# Altium PCB Tigershark 3D R2.PcbDoc (part 3 of 4)
Units mil, origin at the board's own origin, x right, y up, seen from the top; angles counter-clockwise.
Board outline 4100 x 4050 mil, 4 copper layers (Top Layer, Groun Plane, Power Plane, Bottom Layer), stack 61.73 mil thick; 349 components, 235 nets, 1133 pads, 579 vias.
Unrouted connection lines stored in the file: 67.
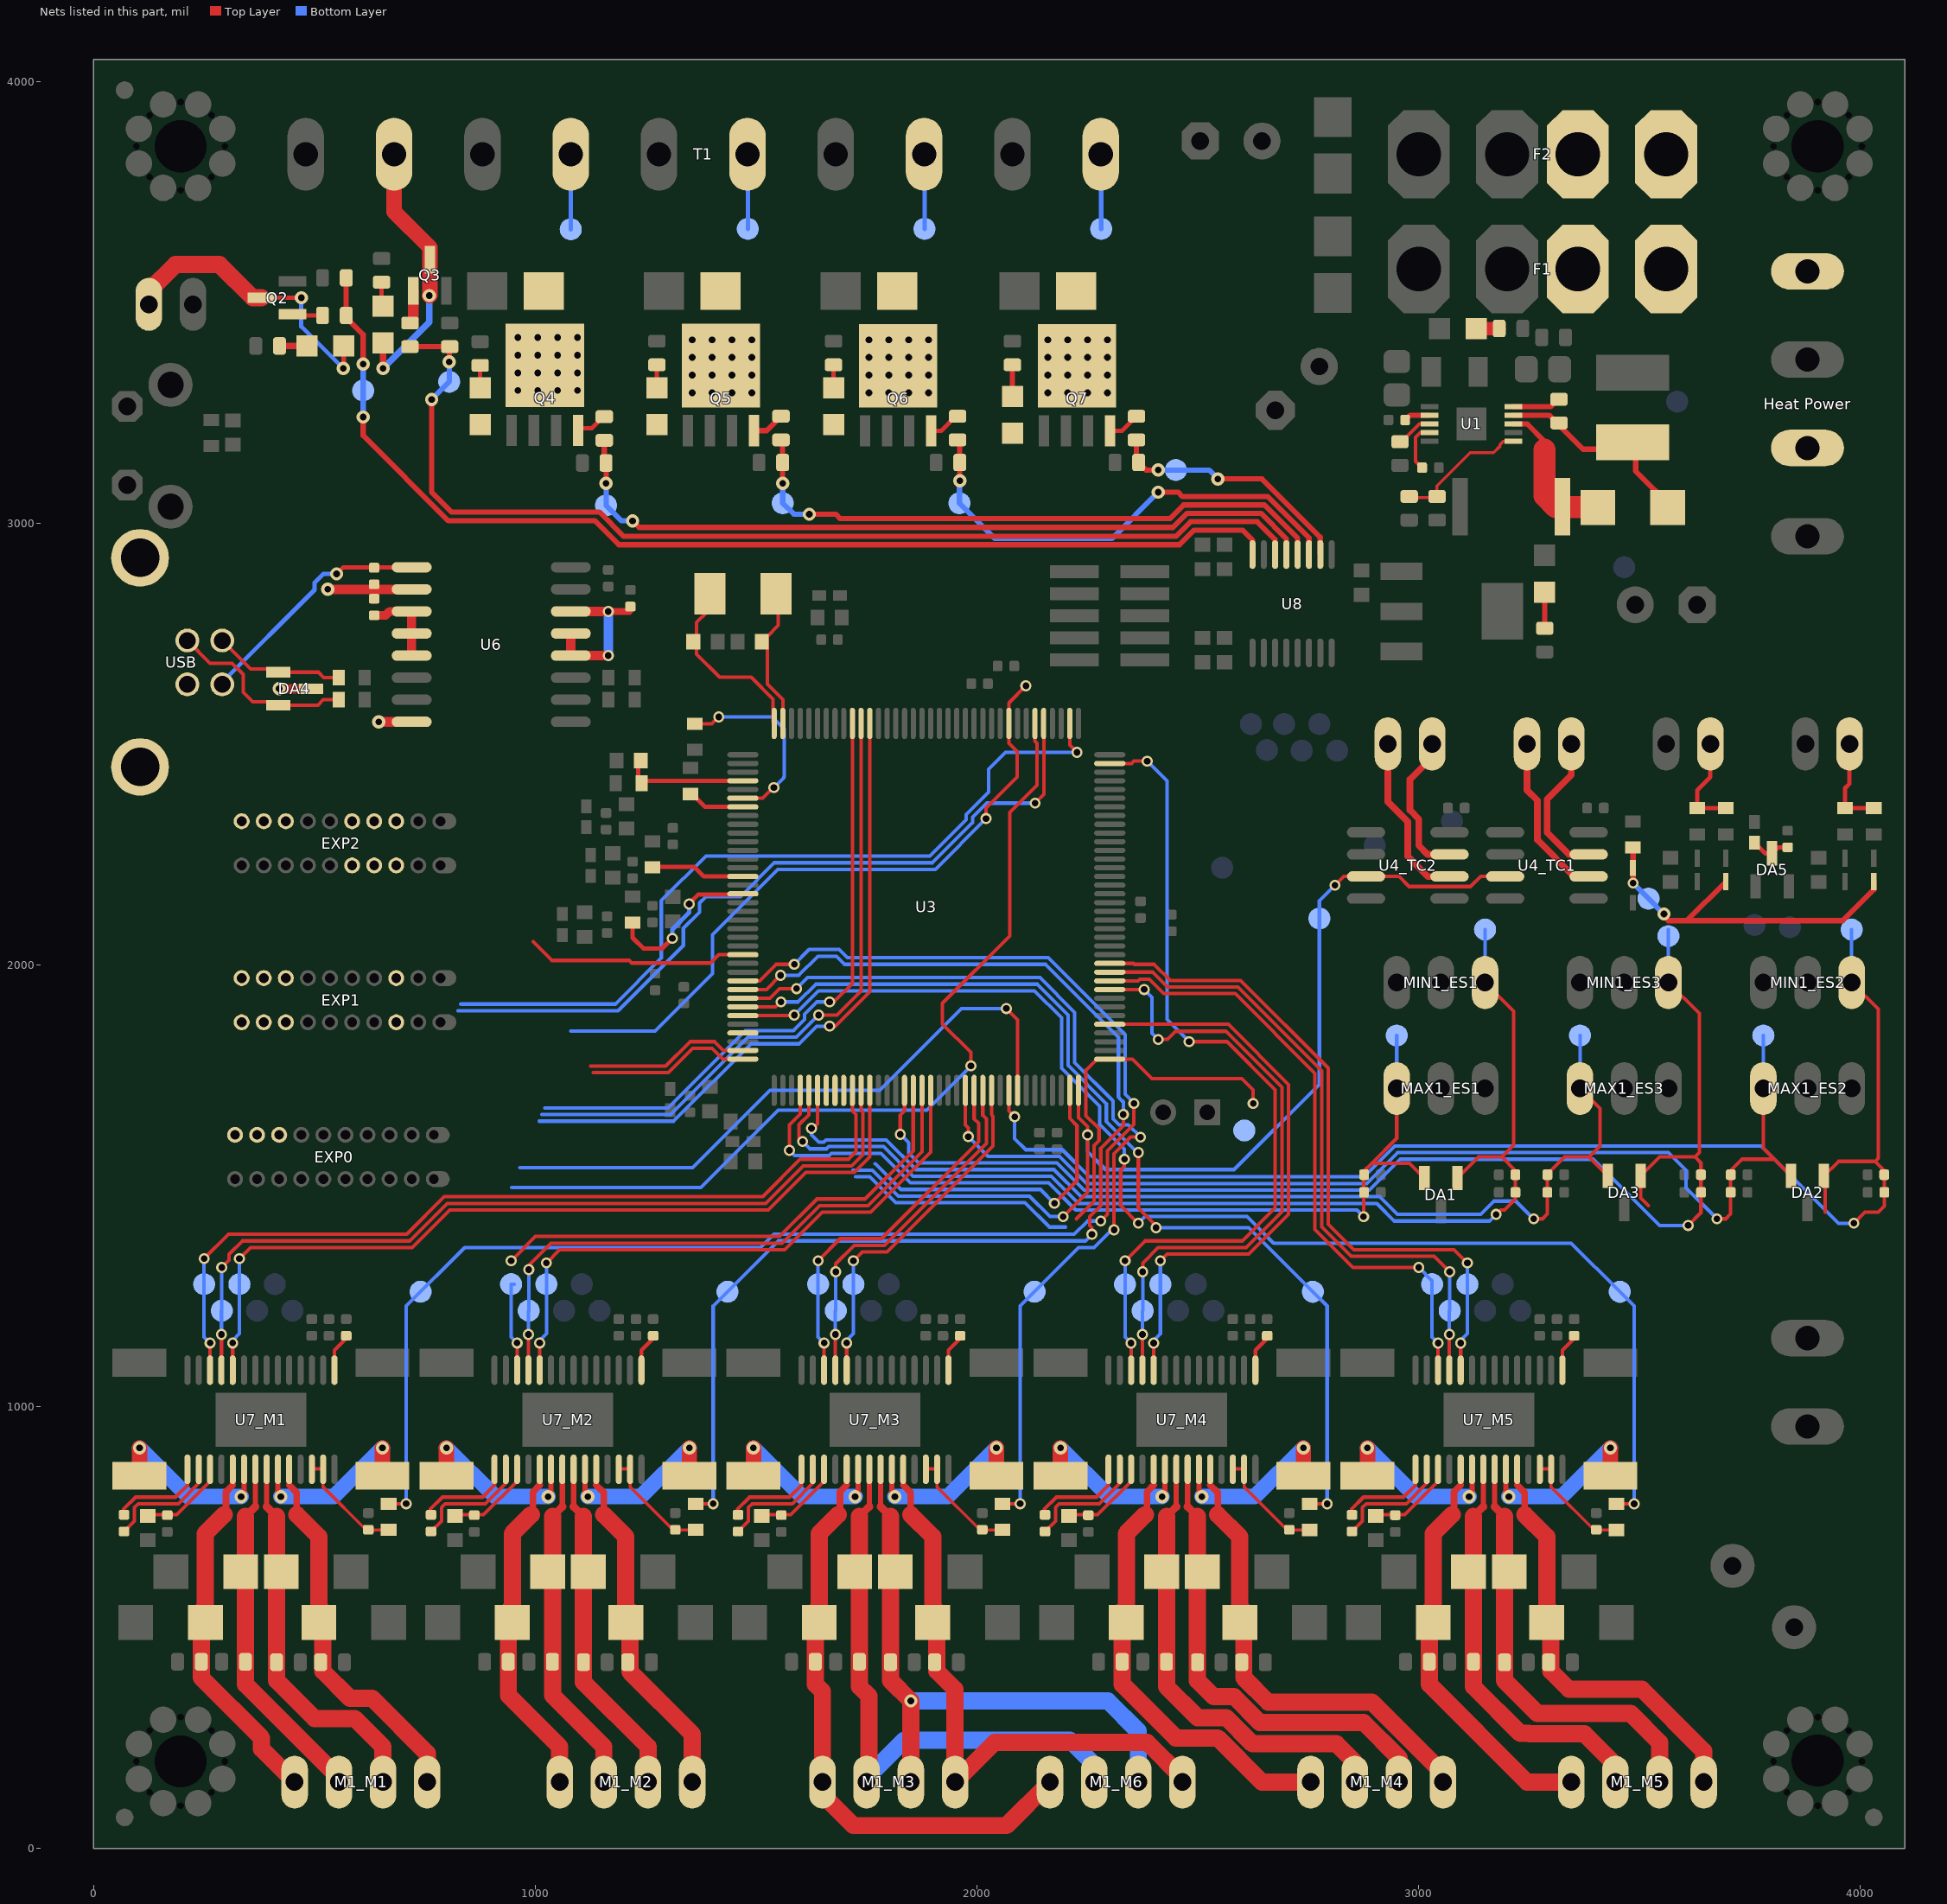
[diagram p5: the nets of this part, all layers, seen from the top]

## Via types
v1: diameter 30, hole 15, Top Layer to Bottom Layer, tented both sides, 304 vias
v2: diameter 25, hole 15, Top Layer to Bottom Layer, tented both sides, 108 vias
v3: diameter 25, hole 15, Top Layer to Bottom Layer, 81 vias
v4: diameter 19.68, hole 7.87, Top Layer to Bottom Layer, 75 vias
v5: diameter 30, hole 15, Top Layer to Bottom Layer, 9 vias
v6: diameter 45, hole 20, Top Layer to Bottom Layer, tented both sides, 2 vias

## Nets (pads, with @x,y where several pads share a name; then routed paths per layer and width w, separated by ;. In a path a pad name is that pad's centre, name@x,y a point inside that pad or via, vN(x,y) a via of type N, cw(c..) or ccw(c..) an arc to the next point about the centre after c; other vN are vias at no path point) (continued)
I2C_SDA: EXP0.18 EXP2.18 U3.9 | length 1545.9
  Top Layer w8: v2(2020.36,2331.1) 2020.36,2354.75 2091,2425.4 2091,2482.57 2072.01,2501.56 U3.9@2072.01,2546.46 2072.01,2592.99 v2(2110.47,2631.46)
  Bottom Layer w8: 1080.1,1850.1 1270.77,1850.1 1401.1,1980.44 1401.1,2068.53 1548.68,2216.1 1905.36,2216.1 v2(2020.36,2331.1) ; v2(2110.47,2631.46) v2@2111.47,2632.46
INPUT_GND: C58.1 C59.1 DA4.3 U6.2 U6.8 USB.4 USB.5 USB.6 | length 369.8
  Top Layer w22: v1(420,2625) DA4.3@492.4,2625 ; v1(530,2850) 635,2850 ; C59.1@635,2828.7 635,2850 ; C58.1@635,2861.3 635,2850 ; v1(645,2550) U6.8@719.88,2550 ; U6.2@719.88,2850 635,2850
MAX_ES1: C2_ES1.1 DA1.2 MAX1_ES1.1 R3_ES1.1 TP10_ES1.1 U3.76 | length 2082.1
  Top Layer w8: v2(1575,1580) 1575,1637.43 1599.57,1661.99 U3.76@1599.57,1715.75 ; v2(2875,1430) C2_ES1.1@2875,1517.56 ; C2_ES1.1@2875,1532.56 2893.44,1551 ; MAX1_ES1.1@2950,1720 2950,1607.56 2893.44,1551 ; DA1.2@3005,1509.8 DA1.2@3012.6,1517.4 2979,1551 2893.44,1551
  Bottom Layer w8: v2(1575,1580) 1586.5,1568.5 1665.27,1568.5 1670.27,1573.5 1782.07,1573.5 1849.11,1506.46 2161.78,1506.46 2223.23,1445 2860,1445 v2(2875,1430) ; MAX1_ES1.1@2950,1720 TP10_ES1.1@2950,1840
MAX_ES2: C2_ES2.1 DA2.2 MAX1_ES2.1 R3_ES2.1 TP10_ES2.1 U3.95 | length 2536.1
  Top Layer w8: U3.95@1973.58,1715.75 1973.58,1637.52 1980,1631.1 v2(1980,1611.1) ; v2(3675,1425) 3695,1425 3706.1,1436.1 3706.1,1470 ; R3_ES2.1@3706.1,1485 3706.1,1533.66 3732.44,1560 3805,1560 ; MAX1_ES2.1@3780,1720 3780,1585 DA2.2@3842.6,1522.4 DA2.2@3840,1519.8
  Bottom Layer w8: v2(1980,1611.1) 2024.65,1566.46 2186.63,1566.46 2248.09,1505 2882.02,1505 2952.02,1575 3565,1575 3605,1535 3605,1495 v2(3675,1425) ; MAX1_ES2.1@3780,1720 TP10_ES2.1@3780,1840
MAX_ES3: C2_ES3.1 DA3.2 MAX1_ES3.1 R3_ES3.1 TP10_ES3.1 U3.78 | length 2450.7
  Top Layer w8: v2@1622.59,1623.58 1638.94,1639.92 U3.78@1638.94,1715.75 ; v2@1625,1625.98 v2(1625,1630) ; v2(3260,1425) 3280,1425 3291.1,1436.1 3291.1,1470 ; C2_ES3.1@3289.95,1525 C2_ES3.1@3289.95,1526.41 ; R3_ES3.1@3291.1,1485 3291.1,1526.1 3330.43,1565.43 3385.43,1565.43 3410,1590 3410,1675 MAX1_ES3.1@3365,1720 ; 3385,1565 DA3.2@3427.6,1522.4 DA3.2@3425,1519.8
  Bottom Layer w8: v2(1625,1630) 1625,1615 1641.5,1598.5 1652.84,1598.5 1657.84,1603.5 1794.5,1603.5 1861.54,1536.46 2174.2,1536.46 2235.66,1475 2911.21,1475 2951.21,1435 3140,1435 3170,1465 3220,1465 v2(3260,1425) ; MAX1_ES3.1@3365,1720 TP10_ES3.1@3365,1840
MCCDZ: EXP2.14 U3.72 | length 371.4
  Top Layer w8: 1131.1,1756.1 1301.1,1756.1 1356,1811 1399.77,1811 1424.16,1786.61 U3.72@1469.65,1786.61
MCCK: EXP2.15 U3.71 | length 375.7
  Top Layer w8: 1124.89,1771.1 1294.89,1771.1 1349.79,1826 1405.98,1826 1425.69,1806.3 U3.71@1469.65,1806.3
MCDZ0: EXP2.8 U3.107 | length 726.6
  Top Layer w8: v2(2175,1460) 2226.1,1511.1 2226.1,1636.1 2209.8,1652.4 U3.107@2209.8,1715.75
  Bottom Layer w8: 1769.36,1550 1827.9,1491.46 2143.54,1491.46 v2(2175,1460)
MCDZ1: EXP2.7 U3.81
MCDZ2: EXP2.6 U3.80
MCDZ3: EXP2.13 U3.79
MIN_ES1: C1_ES1.1 DA1.1 MIN1_ES1.1 R2_ES1.1 TP9_ES1.1 U3.77 | length 2627.2
  Top Layer w8: v2(1605,1600) 1601.93,1600 1596.97,1604.96 1596.97,1638.19 1619.25,1660.47 U3.77@1619.25,1715.75 ; DA1.1@3085,1505 3080,1510 DA1.1@3087.4,1517.4 3135,1565 3188.03,1565 ; MIN1_ES1.1@3150,1960 3215,1895 3215,1591.97 3188.03,1565 ; v2(3175,1435) 3185,1445 3193.9,1445 3218.9,1470 ; R2_ES1.1@3218.9,1485 3218.9,1534.13 3188.03,1565
  Bottom Layer w8: v2(1605,1600) 1621.5,1583.5 1659.05,1583.5 1664.05,1588.5 1788.28,1588.5 1855.33,1521.46 2167.99,1521.46 2229.45,1460 2905,1460 2945,1420 3160,1420 v2(3175,1435) ; MIN1_ES1.1@3150,1960 TP9_ES1.1@3150,2080
MIN_ES2: C1_ES2.1 DA2.1 MIN1_ES2.1 R2_ES2.1 TP9_ES2.1 U3.100 | length 3097.1
  Top Layer w8: U3.100@2072.01,1715.75 2072.01,1669.09 v2(2085,1656.1) ; 3920,1440 3920,1519.8 DA2.1@3917.4,1522.4 3950,1555 4033.03,1555 ; MIN1_ES2.1@3980,1960 4040,1900 4040,1561.97 4033.03,1555 ; v2(3985,1415) 4010,1440 4040,1440 4053.9,1453.9 4053.9,1470 ; R2_ES2.1@4053.9,1485 4053.9,1534.13 4033.03,1555
  Bottom Layer w8: v2(2085,1656.1) 2085,1606.46 2110,1581.46 2192.84,1581.46 2254.3,1520 2875.8,1520 2945.8,1590 3775,1590 3950,1415 v2(3985,1415) ; MIN1_ES2.1@3980,1960 TP9_ES2.1@3980,2080
MIN_ES3: C1_ES3.1 DA3.1 MIN1_ES3.1 R2_ES3.1 TP9_ES3.1 U3.88 | length 2965
  Top Layer w8: v2(1826.1,1616.1) 1826.1,1659.89 1835.79,1669.57 U3.88@1835.79,1715.75 ; 3520,1455 3502.4,1472.6 DA3.1@3502.4,1522.4 3545,1565 3625,1565 ; MIN1_ES3.1@3565,1960 3635,1890 3635,1574.91 3625.04,1564.96 3638.7,1551.3 C1_ES3.1@3638.7,1525 R2_ES3.1@3638.7,1485 ; v2(3610,1410) 3638.7,1438.7 3638.7,1470
  Bottom Layer w8: v2(1826.1,1616.1) 1845,1597.2 1845,1574.21 1867.75,1551.46 2180.42,1551.46 2241.87,1490 2888.23,1490 2958.23,1560 3395,1560 3545,1410 v2(3610,1410) ; MIN1_ES3.1@3565,1960 TP9_ES3.1@3565,2080
MISO: EXP0.19 EXP2.19 TP7.1 U3.108 U4_TC1.7 U4_TC2.7 | length 2373.5
  Top Layer w8: v2(2195,1430) 2250,1485 v2(2250,1615) 2250,1633.42 2229.49,1653.93 U3.108@2229.49,1715.75 ; v2(2810,2180) 2830,2200 U4_TC2.7@2880.51,2200 2955,2200 2977.81,2177.19 3117.19,2177.19 3140,2200 U4_TC1.7@3195.51,2200
  Bottom Layer w8: 1719.02,1535 1763.14,1535 1821.69,1476.46 2118.54,1476.46 2165,1430 v2(2195,1430) ; v2(2250,1615) 2250,1577.2 2290.7,1536.5 2581.5,1536.5 2775,1730 2775,2145 v2(2810,2180)
MOD0E1: TP37_M1.1 U3.84 U7_M1.24 | length 1930.8
  Top Layer w8: U7_M1.24@314.76,1083.46 v3(314.76,1143.9) ; v3(330,1335) 355,1360 721.36,1360 806.36,1445 1527.43,1445 1612.43,1530 1721.8,1530 1757.05,1565.25 U3.84@1757.05,1715.75
  Bottom Layer w8: v3(314.76,1143.9) 314.76,1149.83 329.97,1165.03 TP37_M1.1@329.97,1277.03 v3(330,1335)
MOD0E2: TP37_M2.1 U3.91 U7_M2.24 | length 1361.5
  Top Layer w8: U7_M2.24@1009.76,1083.46 v3(1009.76,1143.9) ; v3(1025,1325) 1055,1355 1564.71,1355 1649.71,1440 1759.08,1440 1894.84,1575.76 U3.91@1894.84,1715.75
  Bottom Layer w8: v3(1009.76,1143.9) 1009.76,1149.83 1024.97,1165.03 TP37_M2.1@1024.97,1277.03 v3(1025,1325)
MOD0E3: TP37_M3.1 U3.98 U7_M3.24 | length 804
  Top Layer w8: U7_M3.24@1704.76,1083.46 v3(1704.76,1143.9) ; v3(1720,1330) 1740,1350 1796.36,1350 2036.1,1589.74 2036.1,1657.32 2032.64,1660.78 U3.98@2032.64,1715.75
  Bottom Layer w8: v3(1704.76,1143.9) 1704.76,1149.83 1719.97,1165.03 TP37_M3.1@1719.97,1277.03 v3(1720,1330)
MOD0E4: TP37_M4.1 U3.113 U7_M4.24 | length 1341.5
  Top Layer w8: U3.113@2300.35,1865.35 2568.73,1865.35 2705,1729.08 2705,1435 2615,1345 2430,1345 v3(2415,1330) ; U7_M4.24@2399.8,1083.43 v3(2399.8,1143.87)
  Bottom Layer w8: v3(2399.8,1143.87) 2399.8,1149.8 2415,1165 TP37_M4.1@2415,1277 v3(2415,1330)
MOD0E5: TP37_M5.1 U3.120 U7_M5.24 | length 1545.3
  Top Layer w8: U3.120@2300.35,2003.15 2354.06,2003.15 2356.1,2001.1 2401.1,2001.1 2437.48,1964.72 2596.64,1964.72 2795,1766.36 2795,1413.13 2853.13,1355 3080,1355 v3(3110,1325) ; U7_M5.24@3094.8,1083.43 v3(3094.8,1143.87)
  Bottom Layer w8: v3(3094.8,1143.87) 3094.8,1149.8 3110,1165 TP37_M5.1@3110,1277 v3(3110,1325)
MOD1E1: TP36_M1.1 U3.83 U7_M1.25 | length 1943.4
  Top Layer w8: U7_M1.25@289.17,1083.46 v3(289.17,1163.31) ; v3(290,1315) 306.5,1331.5 306.5,1344.73 336.77,1375 715.15,1375 800.15,1460 1521.21,1460 1606.21,1545 1715.59,1545 1741.1,1570.51 1741.1,1667.32 1737.36,1671.06 U3.83@1737.36,1715.75
  Bottom Layer w8: v3(289.17,1163.31) 289.17,1216.24 TP36_M1.1@289.97,1217.03 v3(290,1315)
MOD1E2: TP36_M2.1 U3.90 U7_M2.25 | length 1372.1
  Top Layer w8: U7_M2.25@984.17,1083.46 v3(984.17,1163.31) ; v3(985,1310) 985,1320 1035,1370 1558.49,1370 1643.49,1455 1752.87,1455 1875.16,1577.29 U3.90@1875.16,1715.75
  Bottom Layer w8: v3(984.17,1163.31) 984.17,1216.24 TP36_M2.1@984.97,1217.03 984.97,1265 ; 985,1265.03 v3(985,1310)
MOD1E3: TP36_M3.1 U3.97 U7_M3.25 | length 809.4
  Top Layer w8: U7_M3.25@1679.17,1083.46 v3(1679.17,1163.31) ; v3(1680,1305) 1680,1323.23 1721.77,1365 1790.15,1365 2021.1,1595.96 2021.1,1651.1 2012.95,1659.25 U3.97@2012.95,1715.75
  Bottom Layer w8: v3(1679.17,1163.31) 1679.17,1216.24 TP36_M3.1@1679.97,1217.03 v3@1679.97,1297.03
MOD1E4: TP36_M4.1 U3.117 U7_M4.25 | length 1422.8
  Top Layer w8: U3.117@2300.35,1944.09 v2(2378.11,1944.09) ; U7_M4.25@2374.2,1083.43 v3(2374.2,1163.28) ; v3(2375,1305) 2375,1325 2410,1360 2608.79,1360 2690,1441.21 2690,1722.87 2563.27,1849.6 2449.6,1849.6 2431.1,1831.1 v2(2410,1831.1)
  Bottom Layer w8: v3(2374.2,1163.28) 2374.2,1216.2 TP36_M4.1@2375,1217 v3@2375,1297 ; v2(2378.11,1944.09) 2396.1,1926.1 2396.1,1845 v2(2410,1831.1)
MOD1E5: TP36_M5.1 U3.119 U7_M5.25 | length 1471.5
  Top Layer w8: U3.119@2300.35,1983.46 2397.36,1983.46 2431.1,1949.72 2590.42,1949.72 2780,1760.15 2780,1406.91 2846.91,1340 3035,1340 v3(3070,1305) ; U7_M5.25@3069.2,1083.43 v3(3069.2,1163.28)
  Bottom Layer w8: v3(3069.2,1163.28) 3069.2,1216.2 TP36_M5.1@3070,1217 v3@3070,1297
MOD2E1: TP35_M1.1 U3.82 U7_M1.26 | length 1975.9
  Top Layer w8: v3(250,1335) 305,1390 708.93,1390 793.93,1475 1515,1475 1600,1560 1709.38,1560 1726.1,1576.73 1726.1,1661.1 1717.68,1669.53 U3.82@1717.68,1715.75 ; U7_M1.26@263.58,1083.46 v3(263.58,1143.9)
  Bottom Layer w8: v3(250,1335) TP35_M1.1@249.97,1277.03 249.97,1157.51 v3(263.58,1143.9)
MOD2E2: TP35_M2.1 U3.89 U7_M2.26 | length 1356.7
  Top Layer w8: v3(945,1330) 1000,1385 1552.28,1385 1637.28,1470 1746.65,1470 1855.47,1578.82 U3.89@1855.47,1715.75 ; U7_M2.26@958.58,1083.46 v3(958.58,1143.9)
  Bottom Layer w8: TP35_M2.1@952.03,1277.03 TP35_M2.1@944.97,1277.03 944.97,1157.51 v3(958.58,1143.9)
MOD2E3: TP35_M3.1 U3.96 U7_M3.26 | length 847.8
  Top Layer w8: v3(1640,1330) 1690,1380 1783.93,1380 2003.5,1599.57 2003.5,1641.21 1993.27,1651.45 U3.96@1993.27,1715.75 ; U7_M3.26@1653.58,1083.46 v3(1653.58,1143.9)
  Bottom Layer w8: v3(1640,1330) TP35_M3.1@1639.97,1277.03 1639.97,1157.51 v3(1653.58,1143.9)
MOD2E4: TP35_M4.1 U3.143 U7_M4.26 | length 1910
  Top Layer w8: U3.143@2300.35,2455.91 2349.8,2455.91 2355,2461.1 v2(2385,2461.1) ; v3(2335,1330) 2380,1375 2600,1375 2675,1450 2675,1716.65 2565.55,1826.1 v2(2480,1826.1) ; U7_M4.26@2348.61,1083.43 v3(2348.61,1143.87)
  Bottom Layer w8: v3(2335,1330) TP35_M4.1@2335,1277 2335,1157.48 v3(2348.61,1143.87) ; v2(2385,2461.1) 2430,2416.1 2430,1876.1 v2(2480,1826.1)
MOD2E5: TP35_M5.1 U3.118 U7_M5.26 | length 1428.1
  Top Layer w8: U3.118@2300.35,1963.78 2364.56,1963.78 2368.38,1967.59 2389.61,1967.59 2422.48,1934.72 2584.21,1934.72 2765,1753.93 2765,1400.7 2850.7,1315 v3(3000,1315) ; U7_M5.26@3043.61,1083.43 v3(3043.61,1143.87)
  Bottom Layer w8: v3(3000,1315) 3030,1285 TP35_M5.1@3030,1277 3030,1157.48 v3(3043.61,1143.87)
MODE0_EXP1: EXP1.1 U3.2 | length 1801.7
  Top Layer w8: U3.2@2209.8,2546.46 2209.8,2497.4 v2(2226.1,2481.1)
  Bottom Layer w8: 831.1,1911.1 1181.05,1911.1 1285,2015.06 1285,2145 1386.1,2246.1 1892.93,2246.1 1974.89,2328.06 1974.89,2340.08 2004.41,2369.6 2004.6,2369.6 2026.1,2391.1 2026.1,2442.87 2064.33,2481.1 2211.1,2481.1
MODE0_EXP2: EXP1.20 U3.27 | length 1399
  Top Layer w8: v2(1666.1,1916.1) 1676.1,1916.1 1717.68,1957.68 U3.27@1717.68,2546.46
  Bottom Layer w8: 1021.1,1676.1 1300.33,1676.1 1475.33,1851.1 1584.34,1851.1 1609.6,1876.37 1609.6,1888.39 1637.32,1916.1 v2@1656.1,1916.1
MODE1_EXP1: EXP1.2 U3.5 | length 1731.4
  Top Layer w8: v2(2131.1,2366.1) 2151,2386 2151,2546.2 U3.5@2150.75,2546.46
  Bottom Layer w8: 824.89,1896.1 1187.26,1896.1 1335,2043.84 1335,2082.37 1371.82,2119.19 1371.82,2140.05 1386.37,2154.6 1464.6,2154.6 1541.1,2231.1 1899.14,2231.1 1990.12,2322.08 1990.12,2334.1 2010.62,2354.6 2010.82,2354.6 2022.32,2366.1 v2(2131.1,2366.1)
MODE1_EXP2: EXP1.19 U3.26 | length 1444.3
  Top Layer w8: v2(1641.1,1886.1) 1682.46,1886.1 1737.36,1941 U3.26@1737.36,2546.46
  Bottom Layer w8: 1014.89,1661.1 1306.54,1661.1 1481.54,1836.1 1590.55,1836.1 1624.6,1870.16 1624.6,1870.82 1639.89,1886.1 v2(1641.1,1886.1)
MODE2_EXP1: EXP1.3 U3.6 | length 2046.3
  Top Layer w8: v2(1986.1,1771.1) 1986.1,1801.71 1921.71,1866.1 1921.71,1913.07 2073.86,2065.22 2073.86,2344.61 2136,2406.76 2136,2501.2 2131.06,2506.14 U3.6@2131.06,2546.46
  Bottom Layer w8: 946.54,1496.1 1374.89,1496.1 1549.89,1671.1 1886.1,1671.1 v2(1986.1,1771.1)
MODE2_EXP2: EXP1.18 U3.25 | length 1476.9
  Top Layer w8: v2(1666.1,1861.1) 1678.68,1861.1 1757.05,1939.47 U3.25@1757.05,2546.46
  Bottom Layer w8: 1008.68,1646.1 1312.76,1646.1 1487.76,1821.1 1596.76,1821.1 1636.76,1861.1 v2(1666.1,1861.1)
MOSI: EXP0.20 EXP2.20 TP8.1 U3.109 | length 1341.2
  Top Layer w8: 2225,1425 2265,1465 2265,1591.21 2276.1,1602.32 2276.1,1628.53 2246.39,1658.24 2246.39,1761.39 2271.61,1786.61 U3.109@2300.35,1786.61 2351.95,1786.61 2395.96,1742.6 2599.6,1742.6 2625,1717.2 v2(2625,1686.1)
  Bottom Layer w8: 1725.23,1520 1756.93,1520 1815.47,1461.46 2108.54,1461.46 2163.54,1406.46 2200.47,1406.46 ; v2(2625,1686.1) v2@2625,1686.21
NetC3_M1_1: C3_M1.1 D20_M1.A M1_M1.4 U7_M1.5 | length 826
  Top Layer w12: 314.76,822.28 U7_M1.5@314.76,859.06
  Top Layer w15: 295.74,755.74 299.5,759.5 299.5,807.02 314.76,822.28
  Top Layer w39: 295.74,755.74 252.74,712.74 252.74,546.26 243.74,537.26 243.74,386.26 380,250 380,225 M1_M1.4@455,150
NetC3_M2_1: C3_M2.1 D20_M2.A M1_M2.4 U7_M2.5 | length 786.6
  Top Layer w12: 1009.76,822.28 U7_M2.5@1009.76,859.06
  Top Layer w15: 990.74,755.74 994.5,759.5 994.5,807.02 1009.76,822.28
  Top Layer w39: 990.74,755.74 947.74,712.74 947.74,546.26 938.74,537.26 938.74,346.26 1055,230 M1_M2.4@1055,150
NetC3_M3_1: C3_M3.1 D20_M3.A M1_M3.4 M1_M6.4 U7_M3.5 | length 1358.5
  Top Layer w12: 1704.76,822.28 U7_M3.5@1704.76,859.06
  Top Layer w15: 1685.74,755.74 1689.5,759.5 1689.5,807.02 1704.76,822.28
  Top Layer w39: 1685.74,755.74 1642.74,712.74 1642.74,546.26 1633.74,537.26 1633.74,371.31 1650,355.05 M1_M3.4@1650,150 1650,121.5 1720,51.5 2066.5,51.5 M1_M6.4@2165,150
NetC3_M4_1: C3_M4.1 D20_M4.A M1_M4.4 U7_M4.5 | length 1035
  Top Layer w12: 2399.8,822.25 U7_M4.5@2399.8,859.02
  Top Layer w15: 2380.77,755.71 2384.53,759.47 2384.53,806.99 2399.8,822.25
  Top Layer w39: 2380.77,755.71 2337.77,712.71 2337.77,546.23 2328.77,537.23 2328.77,371.28 2450.05,250 2544.84,250 2644.84,150 M1_M4.4@2755,150
NetC3_M5_1: C3_M5.1 D20_M5.A M1_M5.4 U7_M5.5 | length 930
  Top Layer w12: 3094.8,822.25 U7_M5.5@3094.8,859.02
  Top Layer w15: 3075.77,755.71 3079.53,759.47 3079.53,806.99 3094.8,822.25
  Top Layer w39: 3075.77,755.71 3032.77,712.71 3032.77,546.23 3023.77,537.23 3023.77,371.28 3245.05,150 M1_M5.4@3345,150
NetC5_M1_1: C5_M1.1 D21_M1.A M1_M1.3 U7_M1.7 | length 788.7
  Top Layer w12: 365.94,773.46 U7_M1.7@365.94,859.06
  Top Layer w18: 343.74,751.26 365.94,773.46
  Top Layer w39: 343.74,751.26 343.74,371.26 M1_M1.3@550,165
NetC5_M2_1: C5_M2.1 D21_M2.A M1_M2.3 U7_M2.7 | length 766.4
  Top Layer w12: 1060.94,773.46 U7_M2.7@1060.94,859.06
  Top Layer w18: 1038.74,751.26 1060.94,773.46
  Top Layer w39: 1038.74,751.26 1038.74,346.26 1155,230 M1_M2.3@1155,150
NetC5_M3_1: C5_M3.1 D21_M3.A M1_M3.3 M1_M6.3 U7_M3.7 | length 1352.1
  Top Layer w12: 1755.94,773.46 U7_M3.7@1755.94,859.06
  Top Layer w18: 1733.74,751.26 1755.94,773.46
  Top Layer w39: 1733.74,751.26 1733.74,366.26 1755,345 1755,155 M1_M3.3@1750,150
  Bottom Layer w39: M1_M3.3@1750,150 1750,159.9 1835.1,245 2210,245 2265,190 M1_M6.3@2265,150
NetC5_M4_1: C5_M4.1 D21_M4.A M1_M4.3 U7_M4.7 | length 1044.1
  Top Layer w12: 2450.98,773.43 U7_M4.7@2450.98,859.02
  Top Layer w18: 2428.77,751.23 2450.98,773.43
  Top Layer w39: 2428.77,751.23 2428.77,366.23 2499,296 2563.89,296 2623.39,236.5 2813.5,236.5 2855,195 M1_M4.3@2855,150
NetC5_M5_1: C5_M5.1 D21_M5.A M1_M5.3 U7_M5.7 | length 935.6
  Top Layer w12: 3145.98,773.43 U7_M5.7@3145.98,859.02
  Top Layer w18: 3123.77,751.23 3145.98,773.43
  Top Layer w39: 3123.77,751.23 3123.77,366.23 3230,260 3248.77,260 3249.77,259 3375,259 3445,189 M1_M5.3@3445,150
NetC6_M1_1: C6_M1.1 D22_M1.A M1_M1.1 U7_M1.10 | length 867.7
  Top Layer w12: 442.72,822.28 U7_M1.10@442.72,859.06
  Top Layer w15: 442.72,822.28 459.74,805.26 459.74,755.26
  Top Layer w39: 459.74,755.26 509.74,705.26 509.74,546.26 518.74,537.26 518.74,401.26 580,340 630,340 755,215 M1_M1.1@755,150
NetC6_M2_1: C6_M2.1 D22_M2.A M1_M2.1 U7_M2.10 | length 799.1
  Top Layer w12: 1137.72,822.28 U7_M2.10@1137.72,859.06
  Top Layer w15: 1137.72,822.28 1154.74,805.26 1154.74,755.26
  Top Layer w39: 1154.74,755.26 1204.74,705.26 1204.74,546.26 1213.74,537.26 1213.74,399.95 1355,258.69 M1_M2.1@1355,150
NetC6_M3_1: C6_M3.1 D22_M3.A M1_M3.1 M1_M6.1 U7_M3.10 | length 1353
  Top Layer w12: 1832.72,822.28 U7_M3.10@1832.72,859.06
  Top Layer w15: 1832.72,822.28 1849.74,805.26 1849.74,755.26
  Top Layer w39: 1849.74,755.26 1899.74,705.26 1899.74,546.26 1908.74,537.26 1908.74,401.26 1950,360 M1_M3.1@1950,150 2040,240 2384.9,240 2465,159.9 M1_M6.1@2465,150
NetC6_M4_1: C6_M4.1 D22_M4.A M1_M4.1 U7_M4.10 | length 1065.1
  Top Layer w12: 2527.75,822.25 U7_M4.10@2527.75,859.02
  Top Layer w15: 2527.75,822.25 2544.77,805.23 2544.77,755.23
  Top Layer w39: 2544.77,755.23 2594.77,705.23 2594.77,546.23 2603.77,537.23 2603.77,386.23 2659,331 2894.05,331 3055,170.05 M1_M4.1@3055,150
NetC6_M5_1: C6_M5.1 D22_M5.A M1_M5.1 U7_M5.10 | length 980.6
  Top Layer w12: 3222.75,822.25 U7_M5.10@3222.75,859.02
  Top Layer w15: 3222.75,822.25 3239.77,805.23 3239.77,755.23
  Top Layer w39: 3239.77,755.23 3289.77,705.23 3289.77,546.23 3298.77,537.23 3298.77,401.23 3340,360 3505,360 3645,220 M1_M5.1@3645,150
NetC8_M1_1: C8_M1.1 D23_M1.A M1_M1.2 U7_M1.8 | length 871.6
  Top Layer w12: 391.54,773.46 U7_M1.8@391.54,859.06
  Top Layer w18: 391.54,773.46 413.74,751.26
  Top Layer w39: 413.74,751.26 413.74,380.08 499.82,294 591,294 655,230 M1_M1.2@655,150
NetC8_M2_1: C8_M2.1 D23_M2.A M1_M2.2 U7_M2.8 | length 778.8
  Top Layer w12: 1086.54,773.46 U7_M2.8@1086.54,859.06
  Top Layer w18: 1086.54,773.46 1108.74,751.26
  Top Layer w39: 1108.74,751.26 1108.74,376.26 1255,230 M1_M2.2@1255,150
NetC8_M3_1: C8_M3.1 D23_M3.A M1_M3.2 M1_M6.2 U7_M3.8 | length 1395.9
  Top Layer w12: 1781.54,773.46 U7_M3.8@1781.54,859.06
  Top Layer w18: 1781.54,773.46 1803.74,751.26
  Top Layer w39: 1803.74,751.26 1803.74,380.08 v1(1850,333.82) M1_M3.2@1850,150
  Bottom Layer w39: v1(1850,333.82) 2296.18,333.82 2365,265 M1_M6.2@2365,150
NetC8_M4_1: C8_M4.1 D23_M4.A M1_M4.2 U7_M4.8 | length 1071.9
  Top Layer w12: 2476.57,773.43 U7_M4.8@2476.57,859.02
  Top Layer w18: 2476.57,773.43 2498.77,751.23
  Top Layer w39: 2498.77,751.23 2498.77,380.05 2535.35,343.47 2581.48,343.47 2639.95,285 2875,285 2955,205 M1_M4.2@2955,150
NetC8_M5_1: C8_M5.1 D23_M5.A M1_M5.2 U7_M5.8 | length 987.4
  Top Layer w12: 3171.57,773.43 U7_M5.8@3171.57,859.02
  Top Layer w18: 3171.57,773.43 3193.77,751.23
  Top Layer w39: 3193.77,751.23 3193.77,380.05 3268.82,305 3480,305 3545,240 M1_M5.2@3545,150
NetC19_2: C19.2 DA5.3 FB1.1 | length 90.6
  Top Layer w10: FB1.1@3760,2276.38 3783.98,2252.4 DA5.3@3800,2252.4 3813.6,2266 C19.2@3835,2266
NetC22_1: C22.1 U1.4 | length 112
  Top Layer w8: C22.1@3007.3,3125 2992.52,3139.78 2992.52,3194.29 3002.97,3204.74 U1.4@3024.83,3204.74
NetC40_1: C40.1 U1.10 | length 93.4
  Top Layer w12: U1.10@3213.8,3263.8 3298.8,3263.8 C40.1@3304.77,3269.77
NetC40_2: C40.2 D2.C L1.1 U1.9 | length 475.6
  Top Layer w12: U1.9@3213.8,3244.11 3295.12,3244.11 3323,3216.23 3371.97,3167.26 3491,3167.26 3491,3117.74 D2.C@3573.74,3035
NetC43_2: C43.2 U3.36 X2.1 | length 378.4
  Top Layer w8: X2.1@1390,2800 1365,2775 1365,2703.23 1417.13,2651.1 1488.57,2651.1 1538.1,2601.57 1538.1,2548.87 U3.36@1540.51,2546.46
NetC44_2: C44.2 U3.35 X2.2 | length 288.5
  Top Layer w8: X2.2@1550,2810 1550,2768.54 1525,2743.54 1525,2635.89 1560.2,2600.69 U3.35@1560.2,2546.46
NetC56_2: C56.2 U6.12 U6.13 U6.14 | length 367.3
  Top Layer w15: v2(1165,2800) C56.2@1212.56,2800
  Top Layer w22: U6.13@1080.12,2750 U6.12@1080.12,2700 v2(1165,2700) ; U6.14@1080.12,2800 v2(1165,2800)
  Bottom Layer w22: v2(1165,2700) v2(1165,2800)
NetC58_2: C58.2 U6.1 USB.1 | length 546
  Top Layer w10: v1(550,2885) 565,2900 U6.1@719.88,2900
  Bottom Layer w10: USB.1@291,2640 500,2849 500,2865 520,2885 v1(550,2885)
NetC59_2: C59.2 U6.3 U6.4 U6.5 | length 188.6
  Top Layer w20: C59.2@635,2791 661,2791 670,2800 U6.3@719.88,2800 U6.4@719.88,2750 U6.5@719.88,2700
NetC66_M1_2: C66_M1.2 R30_M1.1 U7_M1.3 | length 201.8
  Top Layer w8: C66_M1.2@122.48,752.56 124.92,755 187.78,755 263.58,830.8 U7_M1.3@263.58,859.06
NetC66_M2_2: C66_M2.2 R30_M2.1 U7_M2.3 | length 201.8
  Top Layer w8: C66_M2.2@817.48,752.56 819.92,755 882.78,755 958.58,830.8 U7_M2.3@958.58,859.06
NetC66_M3_2: C66_M3.2 R30_M3.1 U7_M3.3 | length 201.8
  Top Layer w8: C66_M3.2@1512.48,752.56 1514.92,755 1577.78,755 1653.58,830.8 U7_M3.3@1653.58,859.06
NetC66_M4_2: C66_M4.2 R30_M4.1 U7_M4.3 | length 201.8
  Top Layer w8: C66_M4.2@2207.51,752.53 2209.95,754.97 2272.81,754.97 2348.61,830.77 U7_M4.3@2348.61,859.02
NetC66_M5_2: C66_M5.2 R30_M5.1 U7_M5.3 | length 201.8
  Top Layer w8: C66_M5.2@2902.51,752.53 2904.95,754.97 2967.81,754.97 3043.61,830.77 U7_M5.3@3043.61,859.02
NetC68_M1_1: C68_M1.1 U7_M1.1 | length 218.5
  Top Layer w8: C68_M1.1@67.48,753.7 67.48,767.79 94.69,795 185.36,795 212.4,822.05 U7_M1.1@212.4,859.06
NetC68_M1_2: C68_M1.2 U7_M1.2 | length 266.8
  Top Layer w8: C68_M1.2@67.48,716 92.48,741 92.48,771.58 100.9,780 191.57,780 237.99,826.42 U7_M1.2@237.99,859.06
NetC68_M2_1: C68_M2.1 U7_M2.1 | length 218.5
  Top Layer w8: C68_M2.1@762.48,753.7 762.48,767.79 789.69,795 880.36,795 907.4,822.05 U7_M2.1@907.4,859.06
NetC68_M2_2: C68_M2.2 U7_M2.2 | length 266.8
  Top Layer w8: C68_M2.2@762.48,716 787.48,741 787.48,771.58 795.9,780 886.57,780 932.99,826.42 U7_M2.2@932.99,859.06
NetC68_M3_1: C68_M3.1 U7_M3.1 | length 218.5
  Top Layer w8: C68_M3.1@1457.48,753.7 1457.48,767.79 1484.69,795 1575.36,795 1602.4,822.05 U7_M3.1@1602.4,859.06
NetC68_M3_2: C68_M3.2 U7_M3.2 | length 266.8
  Top Layer w8: C68_M3.2@1457.48,716 1482.48,741 1482.48,771.58 1490.9,780 1581.57,780 1627.99,826.42 U7_M3.2@1627.99,859.06
NetC68_M4_1: C68_M4.1 U7_M4.1 | length 218.5
  Top Layer w8: C68_M4.1@2152.51,753.67 2152.51,767.76 2179.72,794.97 2270.39,794.97 2297.43,822.01 U7_M4.1@2297.43,859.02
NetC68_M4_2: C68_M4.2 U7_M4.2 | length 266.8
  Top Layer w8: C68_M4.2@2152.51,715.97 2177.51,740.97 2177.51,771.55 2185.93,779.97 2276.6,779.97 2323.02,826.39 U7_M4.2@2323.02,859.02
NetC68_M5_1: C68_M5.1 U7_M5.1 | length 218.5
  Top Layer w8: C68_M5.1@2847.51,753.67 2847.51,767.76 2874.72,794.97 2965.39,794.97 2992.43,822.01 U7_M5.1@2992.43,859.02
NetC68_M5_2: C68_M5.2 U7_M5.2 | length 266.8
  Top Layer w8: C68_M5.2@2847.51,715.97 2872.51,740.97 2872.51,771.55 2880.93,779.97 2971.6,779.97 3018.02,826.39 U7_M5.2@3018.02,859.02
NetC71_M1_2: C71_M1.2 U7_M1.15 | length 88.9
  Top Layer w8: U7_M1.15@545.08,1083.46 545.08,1127.6 572.48,1155 C71_M1.2@572.48,1161
NetC71_M2_2: C71_M2.2 U7_M2.15 | length 88.9
  Top Layer w8: U7_M2.15@1240.08,1083.46 1240.08,1127.6 1267.48,1155 C71_M2.2@1267.48,1161
NetC71_M3_2: C71_M3.2 U7_M3.15 | length 88.9
  Top Layer w8: U7_M3.15@1935.08,1083.46 1935.08,1127.6 1962.48,1155 C71_M3.2@1962.48,1161
NetC71_M4_2: C71_M4.2 U7_M4.15 | length 88.9
  Top Layer w8: U7_M4.15@2630.11,1083.43 2630.11,1127.57 2657.51,1154.97 C71_M4.2@2657.51,1160.97
NetC71_M5_2: C71_M5.2 U7_M5.15 | length 88.9
  Top Layer w8: U7_M5.15@3325.11,1083.43 3325.11,1127.57 3352.51,1154.97 C71_M5.2@3352.51,1160.97
NetC73_2: C73.2 R23.2 U3.40 | length 282.9
  Top Layer w10: C73.2@1232.56,2462.32 1232.56,2416.54 U3.40@1469.65,2416.54
NetC75_M1_2: C75_M1.2 R31_M1.1 U7_M1.12 U7_M1.13 | length 255
  Top Layer w7: U7_M1.12@493.9,859.06 519.49,859.06 519.49,817.99 617.01,720.47 R31_M1.1@667.48,720.47
NetC75_M2_2: C75_M2.2 R31_M2.1 U7_M2.12 U7_M2.13 | length 255
  Top Layer w7: U7_M2.12@1188.9,859.06 1214.49,859.06 1214.49,817.99 1312.01,720.47 R31_M2.1@1362.48,720.47
NetC75_M3_2: C75_M3.2 R31_M3.1 U7_M3.12 U7_M3.13 | length 255
  Top Layer w7: U7_M3.12@1883.9,859.06 1909.49,859.06 1909.49,817.99 2007.01,720.47 R31_M3.1@2057.48,720.47
NetC75_M4_2: C75_M4.2 R31_M4.1 U7_M4.12 U7_M4.13 | length 255
  Top Layer w7: U7_M4.12@2578.93,859.02 2604.52,859.02 2604.52,817.96 2702.04,720.44 R31_M4.1@2752.51,720.44
NetC75_M5_2: C75_M5.2 R31_M5.1 U7_M5.12 U7_M5.13 | length 255
  Top Layer w7: U7_M5.12@3273.93,859.02 3299.52,859.02 3299.52,817.96 3397.04,720.44 R31_M5.1@3447.51,720.44
NetD2_A: D2.A R9.2 U1.8 | length 326.9
  Top Layer w12: U1.8@3213.8,3224.43 3245.67,3224.43 3284.88,3185.22 3284.88,3166
  Top Layer w50: 3284.88,3166 3284.88,3061.26 R9.2@3310.14,3036 ; R9.2@3325.14,3036 D2.A@3405,3036
NetD7_A: D7.A R8.1 | length 51.9
  Top Layer w30: D7.A@3130.1,3440.43 R8.1@3182,3440.43
NetD9_A: D9.A R11.1 | length 81.9
  Top Layer w12: R11.1@3285,2761.77 D9.A@3285,2843.66
NetD10_A: D10.A R13.1 | length 61.9
  Top Layer w15: R13.1@420.77,3401 D10.A@482.66,3401
NetD10_C: D10.C FAN-1.2 Q2.3 | length 681.7
  Top Layer w10: FAN-1.2@125,3495 FAN-1.2@125,3525 ; Q2.3@379.57,3510 v1(470,3510) ; v1(565,3350) 566,3351 D10.C@566,3401
  Top Layer w39: FAN-1.2@125,3525 185,3585 285,3585 360,3510 Q2.3@379.57,3510
  Bottom Layer w10: v1(470,3510) 470,3445 v1(565,3350)
NetD11_A: D11.A R47.1 | length 55.1
  Top Layer w10: R47.1@652,3545.23 652,3494.34 D11.A@655,3491.34
NetD11_C: D11.C Q3.3 T1.2 | length 595.2
  Top Layer w15: v1(655,3350) D11.C@655,3408
  Top Layer w35: T1.2@680,3810 680,3705 761,3624 Q3.3@761,3596.43 761,3515.4 v1@760.6,3515
  Bottom Layer w15: v1(655,3350) 760,3455 v1(760,3515)
NetD12_1: D12.1 D13.C Q4.5 T1.4 TP11.1 | length 141.3
  Bottom Layer w10: TP11.1@1080,3665 T1.4@1080,3806.32
  other v1: 960,3300 1005,3300 1050,3300 1095,3300 960,3340 1005,3340 1050,3340 1095,3340 960,3380 1005,3380 1050,3380 1095,3380 960,3420 1005,3420 1050,3420 1095,3420
NetD13_A: D13.A R56.1 | length 50.5
  Top Layer w10: D13.A@875,3306.34 R56.1@875,3356.87
NetD14_A: D14.A R60.1 | length 51.9
  Top Layer w10: D14.A@1275,3306.34 R60.1@1275,3358.23
NetD14_C: D14.C D15.1 Q5.5 T1.6 TP12.1 | length 141.3
  Bottom Layer w10: TP12.1@1481,3666 T1.6@1481,3807.32
  other v1: 1355,3295 1400,3295 1445,3295 1490,3295 1355,3335 1400,3335 1445,3335 1490,3335 1355,3375 1400,3375 1445,3375 1490,3375 1355,3415 1400,3415 1445,3415 1490,3415
NetD16_A: D16.A R64.1 | length 51.9
  Top Layer w10: D16.A@1675,3306.34 R64.1@1675,3358.23
NetD16_C: D16.C D17.1 Q6.5 T1.8 TP13.1 | length 141.3
  Bottom Layer w10: TP13.1@1881,3666 T1.8@1881,3807.32
  other v1: 1755,3295 1800,3295 1845,3295 1890,3295 1755,3335 1800,3335 1845,3335 1890,3335 1755,3375 1800,3375 1845,3375 1890,3375 1755,3415 1800,3415 1845,3415 1890,3415
NetD18_A: D18.A R68.1 | length 52
  Top Layer w12: D18.A@2080,3289.72 2080,3341.69
NetD18_C: D18.C D19.1 Q7.5 T1.10 TP14.1 | length 141.3
  Bottom Layer w10: TP14.1@2281,3666 T1.10@2281,3807.32
  other v1: 2160,3295 2205,3295 2250,3295 2295,3295 2160,3335 2205,3335 2250,3335 2295,3335 2160,3375 2205,3375 2250,3375 2295,3375 2160,3415 2205,3415 2250,3415 2295,3415
NetF1_1: "Heat Power.3" F1.1
NetF2_1: "Heat Power.1" F2.1
NetP2_TR1_1: P2_TR1.1 R14_TR1.2 R19_TR1.1 | length 214.6
  Top Layer w10: P2_TR1.1@3975,2500 3975,2410 3965,2400 R19_TR1.1@3965,2354.53 R14_TR1.2@4030,2354.53
NetP2_TR2_1: P2_TR2.1 R14_TR2.2 R19_TR2.1 | length 222.9
  Top Layer w10: P2_TR2.1@3660,2500 3660,2425 3630,2395 R19_TR2.1@3630,2354.53 R14_TR2.2@3695,2354.53
NetQ2_1: Q2.1 R45.2 | length 68.9
  Top Layer w10: Q2.1@450.43,3472.6 453.03,3470 R45.2@518.23,3470
NetQ3_1: Q3.1 R52.2 | length 73.2
  Top Layer w25: R52.2@716,3455.53 723.6,3463.13 Q3.1@723.6,3525.57
NetQ4_4: Q4.4 R58.2 | length 73.2
  Top Layer w10: Q4.4@1096.5,3209.66 1101.36,3214.53 1127.75,3214.53 R58.2@1156,3242.77
NetQ5_4: Q5.4 R62.2 | length 74.5
  Top Layer w12: Q5.4@1495,3209.28 1523.5,3209.28 R62.2@1556,3241.77
NetQ6_4: Q6.4 R66.2 | length 72.4
  Top Layer w10: Q6.4@1896,3208.85 1918.85,3208.85 R66.2@1953.89,3243.89
NetQ7_4: Q7.4 R70.2 | length 73.6
  Top Layer w10: Q7.4@2301,3208.85 2328.08,3208.85 R70.2@2361,3241.77
NetR4_1: R4.1 U3.51 | length 223.6
  Top Layer w10: R4.1@1255,2221.57 1359.53,2221.57 1381.1,2200 U3.51@1469.65,2200
NetR5_2: R5.2 U3.42 | length 434.8
  Top Layer w8: R5.2@1370,2545.16 1399.06,2545.16 v2(1415,2561.1) ; U3.42@1469.65,2377.17 1514.29,2377.17 v2@1540,2402.87
  Bottom Layer w8: v2(1415,2561.1) 1536.1,2561.1 1563.5,2533.7 1563.5,2426.37 1562.5,2425.37 1562.5,2423.6 v2(1540,2401.1)
NetR6_2: R6.2 U3.53 | length 373.8
  Top Layer w10: R6.2@1211.1,2096.57 1220,2087.68 1220,2061.45 1244.85,2036.6 1286.6,2036.6 v2(1310,2060) ; v2(1348.32,2137.77) 1348.32,2138.67 1369.09,2159.44 1468.46,2159.44 U3.53@1469.65,2160.63
  Bottom Layer w10: v2(1310,2060) 1310,2080 1348.32,2118.32 v2(1348.32,2137.77)
NetR7_1: R7.1 U1.3 | length 76.4
  Top Layer w8: R7.1@2961.84,3192.14 2969.14,3192.14 3001.43,3224.43 U1.3@3024.83,3224.43
NetR10_2: R10.2 R12.1 U1.6 | length 291.8
  Top Layer w7: R12.1@2977.36,3057.6 R10.2@3033.45,3057.6 ; R10.2@3041,3065.15 3041,3084 3116.56,3159.56 3169.25,3159.56 3184.18,3174.49 3184.18,3178.18 3191.06,3185.06 U1.6@3213.8,3185.06
NetR17_1: R17.1 U1.2 | length 56.9
  Top Layer w12: R17.1@2971.68,3235.05 2980.73,3244.11 U1.2@3024.83,3244.11
NetR22_2: R22.2 U3.43 | length 129.5
  Top Layer w10: R22.2@1353.05,2388.52 1384.09,2357.48 U3.43@1469.65,2357.48
NetR32_M1_2: R32_M1.2 U7_M1.9 | length 404.1
  Top Layer w12: U7_M1.9@417.13,859.06 417.13,802.87 v1(423.74,796.26)
  Top Layer w35: R32_M1.2@653.74,843.31 v1(653.74,906.26)
  Bottom Layer w35: v1(423.74,796.26) 543.74,796.26 v1(653.74,906.26)
NetR32_M2_2: R32_M2.2 U7_M2.9 | length 404.1
  Top Layer w12: U7_M2.9@1112.13,859.06 1112.13,802.87 v1(1118.74,796.26)
  Top Layer w35: R32_M2.2@1348.74,843.31 v1(1348.74,906.26)
  Bottom Layer w35: v1(1118.74,796.26) 1238.74,796.26 v1(1348.74,906.26)
NetR32_M3_2: R32_M3.2 U7_M3.9 | length 404.1
  Top Layer w12: U7_M3.9@1807.13,859.06 1807.13,802.87 v1(1813.74,796.26)
  Top Layer w35: R32_M3.2@2043.74,843.31 v1(2043.74,906.26)
  Bottom Layer w35: v1(1813.74,796.26) 1933.74,796.26 v1(2043.74,906.26)
NetR32_M4_2: R32_M4.2 U7_M4.9 | length 404.1
  Top Layer w12: U7_M4.9@2502.16,859.02 2502.16,802.84 v1(2508.77,796.23)
  Top Layer w35: R32_M4.2@2738.77,843.28 v1(2738.77,906.23)
  Bottom Layer w35: v1(2508.77,796.23) 2628.77,796.23 v1(2738.77,906.23)
NetR32_M5_2: R32_M5.2 U7_M5.9 | length 404.1
  Top Layer w12: U7_M5.9@3197.16,859.02 3197.16,802.84 v1(3203.77,796.23)
  Top Layer w35: R32_M5.2@3433.77,843.28 v1(3433.77,906.23)
  Bottom Layer w35: v1(3203.77,796.23) 3323.77,796.23 v1(3433.77,906.23)
NetR33_M1_2: R33_M1.2 U7_M1.6 | length 404.1
  Top Layer w12: v1(333.74,796.26) 340.35,802.87 U7_M1.6@340.35,859.06
  Top Layer w35: R33_M1.2@103.74,843.31 v1(103.74,906.26)
  Bottom Layer w35: v1(103.74,906.26) 213.74,796.26 v1(333.74,796.26)
NetR33_M2_2: R33_M2.2 U7_M2.6 | length 404.1
  Top Layer w12: v1(1028.74,796.26) 1035.35,802.87 U7_M2.6@1035.35,859.06
  Top Layer w35: R33_M2.2@798.74,843.31 v1(798.74,906.26)
  Bottom Layer w35: v1(798.74,906.26) 908.74,796.26 v1(1028.74,796.26)
NetR33_M3_2: R33_M3.2 U7_M3.6 | length 404.1
  Top Layer w12: v1(1723.74,796.26) 1730.35,802.87 U7_M3.6@1730.35,859.06
  Top Layer w35: R33_M3.2@1493.74,843.31 v1(1493.74,906.26)
  Bottom Layer w35: v1(1493.74,906.26) 1603.74,796.26 v1(1723.74,796.26)
NetR33_M4_2: R33_M4.2 U7_M4.6 | length 404.1
  Top Layer w12: v1(2418.77,796.23) 2425.39,802.84 U7_M4.6@2425.39,859.02
  Top Layer w35: R33_M4.2@2188.77,843.28 v1(2188.77,906.23)
  Bottom Layer w35: v1(2188.77,906.23) 2298.77,796.23 v1(2418.77,796.23)
NetR33_M5_2: R33_M5.2 U7_M5.6 | length 404.1
  Top Layer w12: v1(3113.77,796.23) 3120.39,802.84 U7_M5.6@3120.39,859.02
  Top Layer w35: R33_M5.2@2883.77,843.28 v1(2883.77,906.23)
  Bottom Layer w35: v1(2883.77,906.23) 2993.77,796.23 v1(3113.77,796.23)
NetR45_1: R45.1 R46.1 TP41.1 U8.16 | length 2541.4
  Top Layer w12: R45.1@571.77,3465 610,3426.77 v1(610,3360) ; R45.1@571.77,3470 R46.1@571.77,3555 ; v1@605,3240 610,3235 610,3198.13 803.13,3005 1135,3005 1189,2951 2458.15,2951 2491.15,2984 2601,2984 2623.43,2961.57 U8.16@2623.43,2928.66
  Bottom Layer w12: v1(610,3240) TP41.1@610,3300 v1(610,3360)
NetR52_1: R52.1 R55.1 TP42.1 U8.14 | length 2451.8
  Top Layer w12: R52.1@716,3399.23 R55.1@806,3399.23 805,3398.23 v1(805,3365) ; v1(765,3280) 765,3070 810,3025 1145,3025 1200,2970 2450.28,2970 2483.28,3003 2634.52,3003 2674.61,2962.91 U8.14@2674.61,2928.66
  Bottom Layer w12: v1(765,3280) TP42.1@805,3320 v1(805,3365)
NetR58_1: R58.1 R59.1 TP48.1 U8.13 | length 1777.2
  Top Layer w12: R59.1@1156,3139.77 R58.1@1156,3187.23 ; R59.1@1159.77,3136 1160,3135.77 v1(1160,3090) ; v1(1220,3005) 1235,2990 2443.41,2990 2475.41,3022 2642.39,3022 2700.2,2964.19 U8.13@2700.2,2928.66
  Bottom Layer w12: v1(1160,3090) TP48.1@1160,3040 1195,3005 v1(1220,3005)
NetR62_1: R62.1 R63.1 TP49.1 U8.12 | length 1400.8
  Top Layer w12: R62.1@1559.77,3184.46 R63.1@1559.77,3137 1559.77,3090.23 v1(1560,3090) ; v1(1620,3020) 1680,3020 1690,3010 2436.54,3010 2467.54,3041 2650.26,3041 2725.8,2965.46 U8.12@2725.8,2928.66
  Bottom Layer w12: v1(1560,3090) TP49.1@1560,3045 1585,3020 v1(1620,3020)
NetR66_1: R66.1 R67.1 TP50.1 U8.11 | length 1087.6
  Top Layer w12: v1(1960.77,3095.77) R67.1@1960.77,3137 R66.1@1960.77,3183.46 ; v1(2410,3070) 2455,3070 2465,3060 2658.13,3060 2751.39,2966.74 U8.11@2751.39,2928.66
  Bottom Layer w12: v1(1960.77,3095.77) 1960,3095 TP50.1@1960,3045 2040,2965 2305,2965 v1(2410,3070)
NetR70_1: R70.1 R71.1 TP51.1 U8.10 | length 573.8
  Top Layer w12: R70.1@2361,3188.23 2361,3141.77 R71.1@2365.77,3137 2382.77,3120 v1(2410,3120) ; v1(2545,3100) 2645,3100 2776.98,2968.02 U8.10@2776.98,2928.66
  Bottom Layer w12: v1(2410,3120) 2525,3120 v1(2545,3100)
NetT2_TC1_1: T2_TC1.1 U4_TC1.3 | length 337.6
  Top Layer w15: T2_TC1.1@3345,2500 3345,2429.49 3290.51,2375 3290.51,2299.49 3340,2250 U4_TC1.3@3384.49,2250
NetT2_TC1_2: T2_TC1.2 U4_TC1.2 | length 377.3
  Top Layer w15: T2_TC1.2@3245,2500 3245,2395.51 3268.51,2372 3268.51,2282.65 3351.16,2200 U4_TC1.2@3384.49,2200
NetT2_TC2_1: T2_TC2.1 U4_TC2.3 | length 336.8
  Top Layer w15: T2_TC2.1@3030,2500 3030,2470 2980,2420 2980,2350 3000,2330 3000,2270 3020,2250 U4_TC2.3@3069.49,2250
NetT2_TC2_2: T2_TC2.2 U4_TC2.2 | length 386.5
  Top Layer w15: T2_TC2.2@2930,2500 2930,2368.89 2975,2323.89 2975,2245.51 3020.51,2200 U4_TC2.2@3069.49,2200
NRST: U3.69
OVREF: D1.2 D3_TR1.2 D3_TR2.2 R1.1 TP2.1 | length 828.2
  Top Layer w12: v2(3485,2185) D1.2@3485,2219.37 R1.1@3485,2260 ; v1(3555,2115) 3555,2110 3565,2100 3960,2100 4030,2170 D3_TR1.2@4030,2188.43 ; 3608.29,2101.71 D3_TR2.2@3695,2188.43
  Bottom Layer w12: v2(3485,2185) TP2.1@3520,2150 v1(3555,2115)
R_N: DA4.1 R18.2 USB.2 | length 298.5
  Top Layer w8: USB.2@291,2734.21 355.31,2669.9 410.1,2669.9 DA4.1@417.6,2662.4 508.51,2662.4 520.91,2650 R18.2@554.59,2650
R_P: DA4.2 R20.2 USB.3 | length 432.3
  Top Layer w8: USB.3@212,2734.21 263.71,2682.5 313.51,2682.5 338.5,2657.51 338.5,2616.72 360.12,2595.1 410.1,2595.1 DA4.2@417.6,2587.6 507.6,2587.6 520,2600 R20.2@554.59,2600
REF1: R31_M1.2 TP33_M1.1 U3.63 | length 3580
  Top Layer w8: R31_M1.2@667.48,779.53 707.01,779.53 v3(707.48,780) ; U3.63@1469.65,1963.78 1507.68,1963.78 1545,2001.1 v2@1590,2001.1 ; v2(2280,1420) 2295,1435 2295,1578.79 2355,1638.79 v2(2355,1686.1)
  Bottom Layer w8: v3(707.48,780) 707.48,1227.52 840,1360 1510,1360 1540,1390 2220,1390 2250,1420 v2(2280,1420) ; v2(1586.1,2001.1) 1619.6,2034.6 1687.6,2034.6 1706.1,2016.1 2161.1,2016.1 2335,1842.2 2335,1707.06 2335.96,1706.1 2336.21,1706.1 2355,1687.32 v2(2355,1686.1)
REF2: R31_M2.2 TP33_M2.1 U3.64 | length 2855.1
  Top Layer w8: R31_M2.2@1362.48,779.53 1402.01,779.53 v3(1402.48,780) ; U3.64@1469.65,1944.09 1522.99,1944.09 v2(1555,1976.1) ; v2(2260,1390) 2260,1405 2255,1410 2255,1430 2280,1455 2280,1585 2331.1,1636.1 v2(2331.1,1661.1)
  Bottom Layer w8: v3(1402.48,780) 1402.48,1227.52 1550,1375 2245,1375 v2(2260,1390) ; v2(1555,1976.1) 1596.1,1976.1 1639.6,2019.6 1681.39,2019.6 1699.89,2001.1 2154.89,2001.1 2320,1835.99 2320,1700.84 2322.6,1698.24 2322.6,1697.29 2328.79,1691.1 2330,1691.1 2331.1,1690 v2(2331.1,1661.1)
REF3: R31_M3.2 TP33_M3.1 U3.65 | length 2178.4
  Top Layer w8: U3.65@1469.65,1924.41 1531.18,1924.41 1552.87,1946.1 v2@1590,1946.1 ; R31_M3.2@2057.48,779.53 2097.01,779.53 v3(2097.48,780) ; v2(2310,1400) 2310,1572.57 2347.43,1610 v2(2370,1610)
  Bottom Layer w8: v2(1591.1,1946.1) 1616.1,1971.1 2142.46,1971.1 2221.1,1892.46 2221.1,1778.53 2307.6,1692.03 2307.6,1651.37 2321.37,1637.6 2342.4,1637.6 v2(2370,1610) ; v3(2097.48,780) 2097.48,1227.52 TP33_M3.1@2130,1260 2230,1360 2265,1360 2305,1400 v2(2310,1400)
REF4: R31_M4.2 TP33_M4.1 U3.66 | length 2302.4
  Top Layer w8: U3.66@1469.65,1904.72 1543.62,1904.72 v2@1555,1916.1 ; v2(2365,1575) 2365,1450 2405,1410 v3(2405,1405) ; R31_M4.2@2752.51,779.5 2792.04,779.5 v3(2792.51,779.97)
  Bottom Layer w8: v2(1556.1,1916.1) 1594.89,1916.1 1634.89,1956.1 2136.25,1956.1 2206.1,1886.25 2206.1,1772.32 2292.6,1685.82 2292.6,1645.16 2365,1572.76 v2(2365,1575) ; v3(2405,1405) 2615,1405 TP33_M4.1@2760.03,1259.97 2792.51,1227.49 v3(2792.51,779.97)
REF5: R31_M5.2 TP33_M5.1 U3.67 | length 3016.8
  Top Layer w8: U3.67@1469.65,1885.04 v2@1588.94,1885.04 ; v2(2333.5,1560) 2333.5,1543.5 2325,1535 2325,1455 v2(2365,1415) ; R31_M5.2@3447.51,779.5 3487.04,779.5 v3(3487.51,779.97)
  Bottom Layer w8: v2(1586.1,1886.1) 1641.1,1941.1 2130.04,1941.1 2191.1,1880.04 2191.1,1766.1 2277.6,1679.6 2277.6,1638.94 2333.5,1583.04 v2(2333.5,1560) ; v2(2365,1415) 2380,1430 2611.21,1430 2671.21,1370 3345,1370 TP33_M5.1@3455.03,1259.97 3487.51,1227.49 v3(3487.51,779.97)
REF_EXP1: EXP1.8 U3.101 | length 1446
  Top Layer w8: v2(2066.1,1901.1) 2091.69,1875.51 U3.101@2091.69,1715.75
  Bottom Layer w8: 965.18,1541.1 1356.25,1541.1 1531.25,1716.1 1779.34,1716.1 1964.34,1901.1 v2(2066.1,1901.1)
REF_EXP2: EXP1.13 U3.60 | length 502.3
  Top Layer w8: 995.1,2052.1 1037.2,2010 1212.16,2010 1218.16,2004 1396.37,2004 1415.21,2022.83 U3.60@1469.65,2022.83